# EAGLE board DME_Board_2 (EAGLE 7.2.0)
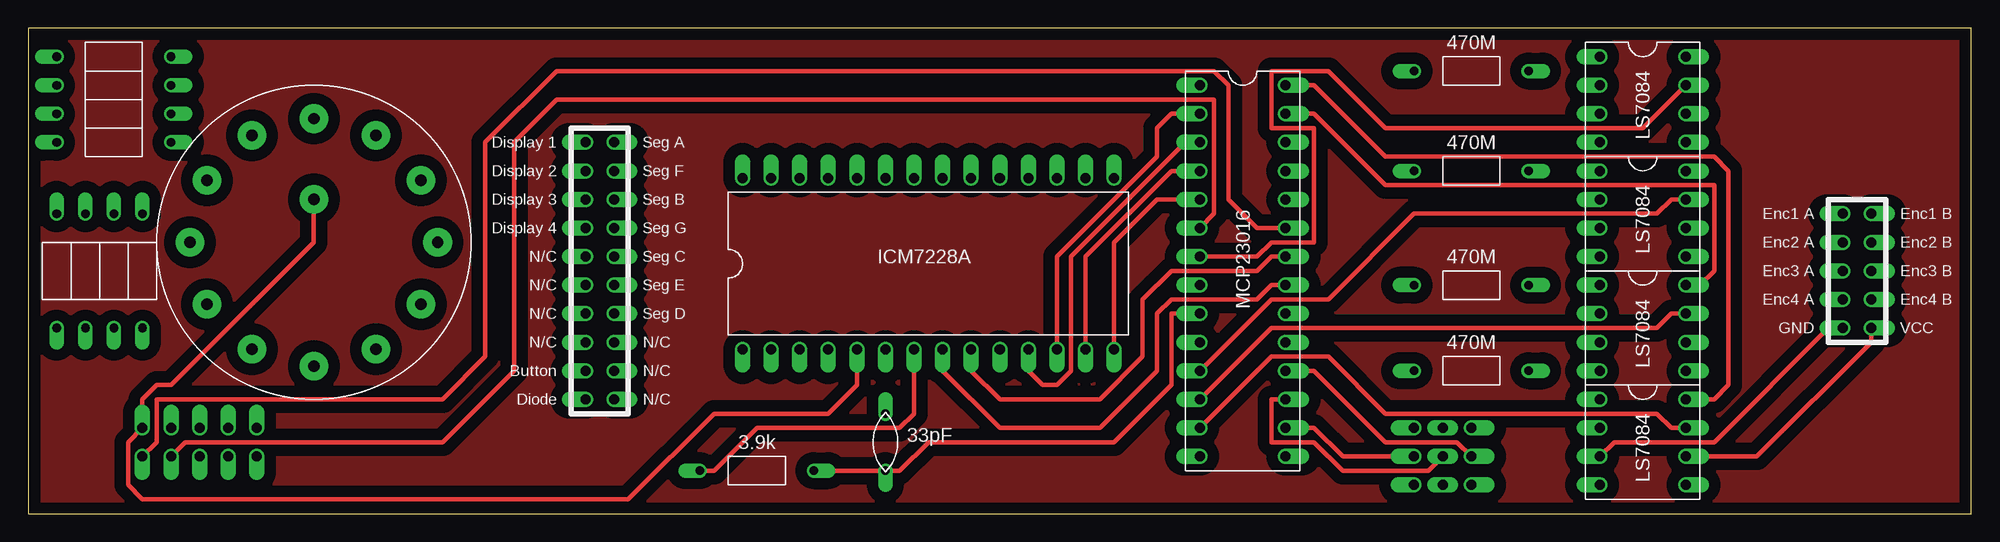
[diagram p0: board, top side]
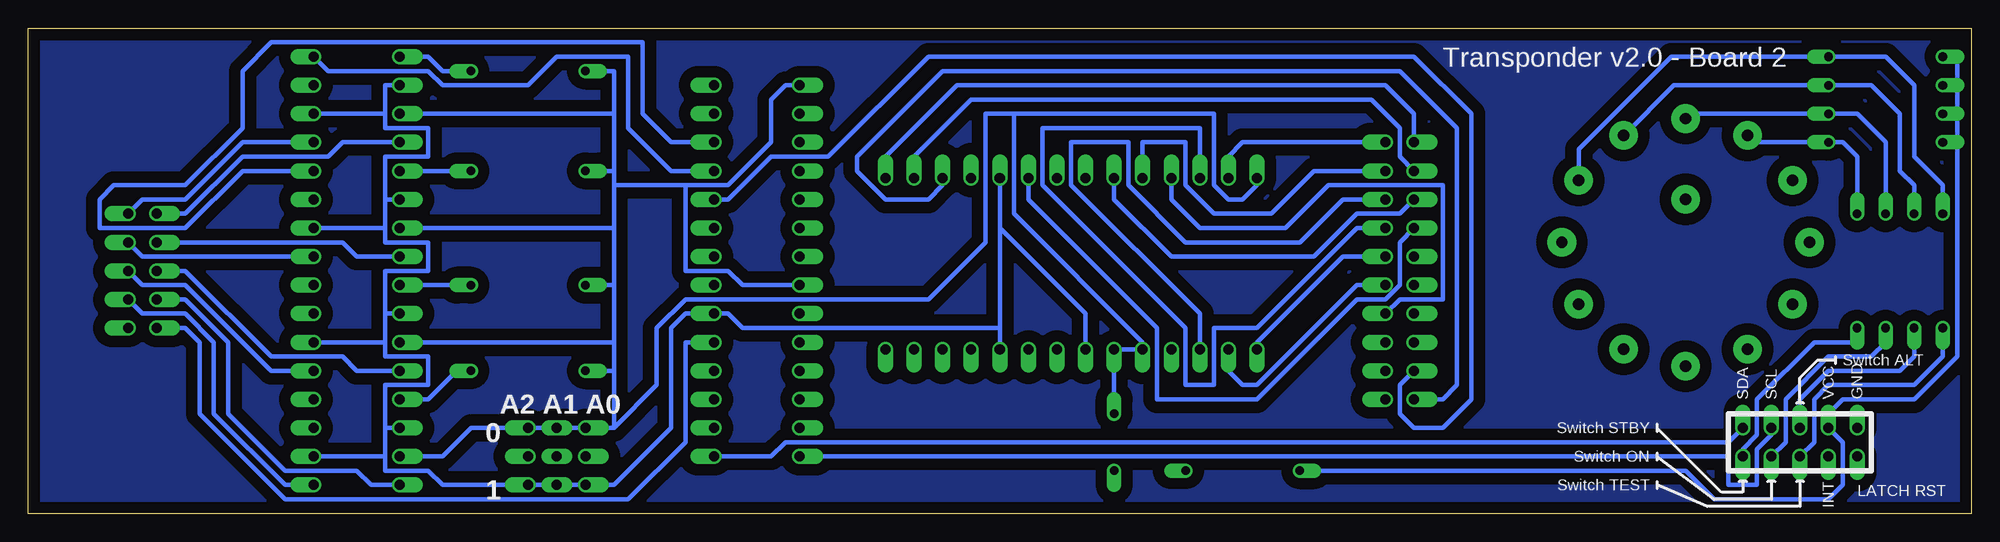
[diagram p1: board, bottom side, seen from below]

Size 172.72 x 43.18 mm. Coordinates in mm from the lower left corner, seen from the top.
Outline: 0,43.18 0,0 172.72,0 172.72,43.18 0,43.18
Copper layers (1*16): Top 0.035mm / dielectric 1.5mm / Bottom 0.035mm
Design rules "RadioStack_v2": minimum track width 0.2mm, minimum drill 0.4mm, track to track 0.2mm, track to pad 0.2mm, pad to pad 0.2mm, via to via 0.2mm, smd to smd 0.2mm, copper to edge 0.5mm, drill to drill 8mil, minimum pad ring 10mil, minimum via ring 8mil, stop-mask expansion 4mil, vias tented up to drill 0mil, thermal gap 10mil

## Footprints (pad centres in the part's own frame; a part is rotated, then mirrored left to right if it is on the bottom)
LS7084 = drill 0.889 pad 1.27 offset: P$1 0,0; P$2 0,-2.54; P$3 0,-5.08; P$4 0,-7.62; P$5 7.62,-7.62; P$6 7.62,-5.08; P$7 7.62,-2.54; P$8 7.62,0
LISTA_2X5 = drill 0.889 pad 1.27 offset: 1 0,0; 2 0,-2.54; 3 0,-5.08; 4 0,-7.62; 5 0,-10.16; 6 2.54,-10.16; 7 2.54,-7.62; 8 2.54,-5.08; 9 2.54,-2.54; 10 2.54,0
ICM7228A = drill 0.889 pad 1.27 offset: P$1 0,0; P$2 0,-2.54 | drill 0.889 offset: P$3 0,-5.08; P$4 0,-7.62; P$5 0,-10.16; P$6 0,-12.7; P$7 0,-15.24; P$8 0,-17.78; P$9 0,-20.32; P$10 0,-22.86; P$11 0,-25.4; P$12 0,-27.94; P$13 0,-30.48; P$14 0,-33.02; P$15 15.24,-33.02; P$16 15.24,-30.48; P$17 15.24,-27.94; P$18 15.24,-25.4; P$19 15.24,-22.86; P$20 15.24,-20.32; P$21 15.24,-17.78; P$22 15.24,-15.24; P$23 15.24,-12.7; P$24 15.24,-10.16; P$25 15.24,-7.62; P$26 15.24,-5.08; P$27 15.24,-2.54; P$28 15.24,0
LISTA_2X10 = drill 0.889 pad 1.27 offset: 1 0,0; 2 0,-2.54; 3 0,-5.08; 4 0,-7.62; 5 0,-10.16; 6 0,-12.7; 7 0,-15.24; 8 0,-17.78; 9 0,-20.32; 10 0,-22.86; 11 2.54,-22.86; 12 2.54,-20.32; 13 2.54,-17.78; 14 2.54,-15.24; 15 2.54,-12.7; 16 2.54,-10.16; 17 2.54,-7.62; 18 2.54,-5.08; 19 2.54,-2.54; 20 2.54,0
REZISTOR = drill 0.762 pad 1.27 offset: P$1 -5.08,0; P$2 5.08,0
MCP23016 = drill 0.889 pad 1.27 offset: A0 7.62,-30.48; A1 7.62,-27.94; A2 7.62,-25.4; CLK 0,-20.32; GP0.0 7.62,-17.78; GP0.1 7.62,-15.24; GP0.2 7.62,-12.7; GP0.3 7.62,-10.16; GP0.4 7.62,-7.62; GP0.5 7.62,-5.08; GP0.6 7.62,-2.54; GP0.7 7.62,0; GP1.0 0,-2.54; GP1.1 0,-5.08; GP1.2 0,-7.62; GP1.3 0,-10.16; GP1.4 0,-15.24; GP1.5 0,-25.4; GP1.6 0,-27.94; GP1.7 0,-30.48; SCL 0,-33.02; SDA 7.62,-33.02; TP 0,-22.86; VDD 7.62,-20.32; VSS1 0,0; VSS2 0,-17.78; VSS3 7.62,-22.86; ~INT 0,-12.7
ADRESA_0..2 = drill 0.889 pad 1.27 offset: P$1 0,0; P$2 0,-2.54; P$3 0,-5.08; P$7 5.08,0; P$8 5.08,-2.54; P$9 5.08,-5.08 | drill 0.889 pad 1.27 long: P$4 2.54,-5.08; P$5 2.54,-2.54; P$6 2.54,0
KONDENZATOR = drill 0.762 pad 1.27 offset: P$1 -2.54,0; P$2 2.54,0
ROTARY_SWITCH = drill 1.016 pad 2.54: 1 5.5,9.5; 2 9.5,5.5; 3 11,0; 4 9.5,-5.5; 5 5.5,-9.5; 6 0,-11; 7 -5.5,-9.5; 8 -9.5,-5.5; 9 -11,0; 10 -9.5,5.5; 11 -5.5,9.5; 12 0,11; A 0,3.81

## Placement (x,y rotation side)
U$1  LS7084  [LS7084]  139.7,40.64 0 top
U$2  LS7084  [LS7084]  139.7,30.48 0 top
U$3  LS7084  [LS7084]  139.7,20.32 0 top
U$4  LS7084  [LS7084]  139.7,10.16 0 top
U$5  LISTA_2X5  [LISTA_2X5]  10.16,7.62 270 bottom
U$6  ICM7228A  [ICM7228A]  63.5,14.61 90 top
U$7  LISTA_2X10  [LISTA_2X10]  49.53,33.02 0 top
U$8  470M  [REZISTOR]  128.27,39.37 0 top
U$9  MCP23016  [MCP23016]  104.14,38.1 0 top
U$10  470M  [REZISTOR]  128.27,30.48 0 top
U$11  ADRESA_0..2  [ADRESA_0..2]  128.27,2.54 180 top
U$12  470M  [REZISTOR]  128.27,20.32 0 top
U$13  470M  [REZISTOR]  128.27,12.7 0 top
U$14  3.9k  [REZISTOR]  64.77,3.81 0 top
U$15  33pF  [KONDENZATOR]  76.2,6.35 90 top
U$16  ROTARY_SWITCH  [ROTARY_SWITCH]  25.4,24.13 0 top
U$17  [REZISTOR]  7.62,33.02 0 top
U$18  [REZISTOR]  7.62,35.56 0 top
U$19  [REZISTOR]  7.62,38.1 0 top
U$20  [REZISTOR]  7.62,40.64 0 top
U$21  [REZISTOR]  10.16,21.59 90 top
U$22  [REZISTOR]  7.62,21.59 90 top
U$23  [REZISTOR]  5.08,21.59 90 top
U$24  [REZISTOR]  2.54,21.59 90 top
U$27  LISTA_2X5  [LISTA_2X5]  161.29,26.67 0 top

## Library data of the parts
U$1-U$24 U$27 = RadioStack_v2

## Nets
GND: U$1.P$3 U$2.P$3 U$3.P$3 U$4.P$3 U$5.1 U$6.P$5 U$6.P$6 U$6.P$28 U$8.P$1 U$9.VSS1 U$9.VSS2 U$9.VSS3 U$10.P$1 U$11.P$3 U$11.P$4 U$11.P$9 U$12.P$1 U$13.P$1 U$15.P$2 U$16.A U$27.5
N$1: U$6.P$27 U$7.20
N$2: U$6.P$24 U$7.19
N$3: U$6.P$3 U$7.18
N$4: U$6.P$26 U$7.17
N$5: U$6.P$1 U$7.16
N$6: U$6.P$2 U$7.15
N$7: U$6.P$25 U$7.14
N$8: U$6.P$15 U$7.1
N$9: U$6.P$16 U$7.2
N$10: U$6.P$23 U$7.3
N$11: U$6.P$20 U$7.4
N$12: U$1.P$2 U$1.P$6 U$2.P$2 U$2.P$6 U$3.P$2 U$3.P$6 U$4.P$2 U$4.P$6 U$5.2 U$6.P$7 U$6.P$10 U$6.P$19 U$9.VDD U$11.P$1 U$11.P$6 U$11.P$7 U$14.P$1 U$17.P$1 U$18.P$1 U$19.P$1 U$20.P$1 U$27.6
N$13: U$6.P$12 U$9.GP1.0
N$14: U$1.P$8 U$9.GP0.4
N$15: U$2.P$8 U$9.GP0.5
N$16: U$1.P$1 U$8.P$2
N$17: U$2.P$1 U$10.P$2
N$18: U$3.P$1 U$12.P$2
N$19: U$4.P$1 U$13.P$2
N$20: U$6.P$11 U$9.GP1.1
N$21: U$3.P$8 U$9.GP0.6
N$22: U$4.P$8 U$9.GP0.7
N$23: U$1.P$7 U$9.GP1.4
N$24: U$1.P$4 U$27.1
N$25: U$1.P$5 U$27.10
N$26: U$2.P$4 U$27.2
N$27: U$2.P$5 U$27.9
N$28: U$3.P$4 U$27.3
N$29: U$3.P$5 U$27.8
N$30: U$4.P$4 U$27.4
N$31: U$4.P$5 U$27.7
N$32: U$2.P$7 U$9.GP1.5
N$33: U$3.P$7 U$9.GP1.6
N$34: U$4.P$7 U$9.GP1.7
N$35: U$9.A0 U$11.P$8
N$36: U$9.A1 U$11.P$5
N$37: U$9.A2 U$11.P$2
N$38: U$6.P$13 U$9.GP1.2
N$39: U$6.P$14 U$9.GP1.3
N$40: U$16.11 U$17.P$2 U$21.P$2
N$41: U$6.P$8 U$9.GP0.0
N$42: U$6.P$9 U$9.GP0.1
N$43: U$16.12 U$18.P$2 U$22.P$2
N$44: U$5.4 U$9.SCL
N$45: U$5.5 U$9.SDA
N$46: U$5.9 U$9.~INT
N$47: U$5.10 U$9.GP0.2
N$48: U$9.CLK U$14.P$2 U$15.P$1
N$49: U$7.9 U$9.GP0.3
N$50: U$6.P$17 U$7.10
N$51: U$16.1 U$19.P$2 U$23.P$2
N$52: U$16.2 U$20.P$2 U$24.P$2
N$53: U$5.8 U$24.P$1
N$54: U$5.3 U$23.P$1
N$55: U$5.7 U$22.P$1
N$56: U$5.6 U$21.P$1

## Tracks (layer width: path | path; a pad name or v marks a point on that pad's centre or on a via)
GND
  Top 0.406: U$27.5 160.02,16.51 149.86,6.35 140.97,6.35 U$4.P$3 | U$6.P$5 73.66,11.43 71.12,8.89 60.96,8.89 53.34,1.27 10.16,1.27 8.89,2.54 8.89,6.35 U$5.1 10.16,10.16 11.43,11.43 12.7,11.43 25.4,24.13 U$16.A
  Bottom 0.406: U$6.P$28 63.5,29.21 64.77,27.94 66.04,27.94 67.31,29.21 67.31,35.56 85.09,35.56 | 85.09,35.56 85.09,26.67 73.66,15.24 U$6.P$5 U$6.P$6 U$15.P$2 | 120.65,7.62 U$11.P$9 U$11.P$4 U$11.P$3 133.35,7.62 135.89,5.08 U$4.P$3 | 120.65,7.62 116.84,11.43 116.84,16.51 114.3,19.05 92.71,19.05 87.63,24.13 87.63,35.56 85.09,35.56 | U$8.P$1 120.65,39.37 120.65,35.56 | 120.65,35.56 U$1.P$3 | 120.65,35.56 120.65,30.48 | 120.65,30.48 U$10.P$1 | U$2.P$3 120.65,25.4 | 120.65,25.4 120.65,29.21 | 120.65,29.21 120.65,30.48 | 120.65,25.4 120.65,20.32 | 120.65,20.32 U$12.P$1 | 120.65,12.7 120.65,15.24 | 120.65,15.24 120.65,20.32 | U$3.P$3 120.65,15.24 | U$13.P$1 120.65,12.7 | 120.65,12.7 120.65,7.62 | U$9.VSS1 105.41,38.1 106.68,36.83 106.68,33.02 110.49,29.21 114.3,29.21 | 114.3,29.21 120.65,29.21 | U$9.VSS2 109.22,20.32 110.49,21.59 114.3,21.59 114.3,29.21 | U$9.VSS3 114.3,15.24 114.3,6.35 119.38,1.27 149.86,1.27 157.48,8.89 157.48,15.24 158.75,16.51 U$27.5
N$1
  Bottom 0.406: U$7.20 64.77,33.02 66.04,31.75 U$6.P$27
N$2
  Bottom 0.406: U$7.19 58.42,30.48 62.23,26.67 67.31,26.67 69.85,29.21 69.85,33.02 73.66,33.02 U$6.P$24
N$3
  Bottom 0.406: U$7.18 55.88,27.94 59.69,24.13 69.85,24.13 74.93,29.21 74.93,33.02 80.01,33.02 80.01,29.21 68.58,17.78 U$6.P$3
N$4
  Bottom 0.406: U$6.P$26 68.58,34.29 82.55,34.29 82.55,29.21 69.85,16.51 69.85,11.43 67.31,11.43 67.31,16.51 63.5,16.51 54.61,25.4 U$7.17
N$5
  Bottom 0.406: U$7.16 55.88,22.86 63.5,15.24 U$6.P$1
N$6
  Bottom 0.406: U$7.15 54.61,20.32 63.5,11.43 64.77,11.43 66.04,12.7 U$6.P$2
N$7
  Bottom 0.406: U$6.P$25 71.12,27.94 68.58,25.4 60.96,25.4 57.15,29.21 46.99,29.21 46.99,19.05 50.8,19.05 U$7.14
N$8
  Bottom 0.406: U$7.1 49.53,35.56 52.07,38.1 90.17,38.1 96.52,31.75 U$6.P$15
N$9
  Bottom 0.406: U$6.P$16 93.98,31.75 88.9,36.83 53.34,36.83 50.8,34.29 50.8,31.75 U$7.2
N$10
  Bottom 0.406: U$7.3 50.8,26.67 54.61,26.67 58.42,22.86 71.12,22.86 76.2,27.94 U$6.P$23
N$11
  Bottom 0.406: U$6.P$20 83.82,27.94 72.39,16.51 72.39,10.16 63.5,10.16 54.61,19.05 52.07,19.05 50.8,20.32 50.8,24.13 U$7.4
N$12
  Top 0.406: U$27.6 163.83,15.24 153.67,5.08 U$4.P$6 | U$6.P$7 78.74,8.89 77.47,7.62 64.77,7.62 60.96,3.81 U$14.P$1
  Bottom 0.406: U$1.P$2 140.97,38.1 140.97,35.56 | U$3.P$2 140.97,17.78 | U$4.P$2 140.97,7.62 | 140.97,5.08 U$4.P$6 | U$2.P$2 140.97,27.94 | 140.97,27.94 140.97,31.75 137.16,31.75 137.16,34.29 140.97,34.29 140.97,35.56 | 140.97,17.78 140.97,21.59 137.16,21.59 137.16,24.13 140.97,24.13 140.97,25.4 | 140.97,25.4 140.97,27.94 | 140.97,7.62 140.97,11.43 137.16,11.43 137.16,13.97 140.97,13.97 140.97,15.24 | 140.97,15.24 140.97,17.78 | U$3.P$6 140.97,15.24 | U$2.P$6 140.97,25.4 | U$1.P$6 140.97,35.56 | 140.97,5.08 140.97,3.81 137.16,3.81 135.89,2.54 U$11.P$1 U$11.P$6 U$11.P$7 120.65,2.54 115.57,7.62 115.57,16.51 114.3,17.78 U$9.VDD 110.49,17.78 109.22,16.51 86.36,16.51 | 140.97,5.08 140.97,7.62 | U$6.P$19 86.36,25.4 | 86.36,25.4 86.36,16.51 | 86.36,16.51 U$6.P$10 | U$6.P$7 78.74,17.78 86.36,25.4 | 1.27,33.02 1.27,13.97 5.08,10.16 11.43,10.16 12.7,8.89 U$5.2 11.43,6.35 11.43,2.54 12.7,1.27 22.86,1.27 25.4,3.81 U$14.P$1 | U$17.P$1 1.27,33.02 | 1.27,33.02 1.27,35.56 | U$18.P$1 1.27,35.56 | 1.27,35.56 1.27,38.1 | U$19.P$1 1.27,38.1 | 1.27,38.1 1.27,40.64 U$20.P$1
N$13
  Top 0.406: U$6.P$12 91.44,22.86 100.33,31.75 100.33,34.29 101.6,35.56 U$9.GP1.0
N$14
  Bottom 0.406: U$1.P$8 146.05,39.37 137.16,39.37 135.89,38.1 128.27,38.1 125.73,40.64 119.38,40.64 119.38,34.29 115.57,30.48 U$9.GP0.4
N$15
  Bottom 0.406: U$2.P$8 153.67,30.48 158.75,25.4 166.37,25.4 166.37,27.94 165.1,29.21 158.75,29.21 153.67,34.29 153.67,39.37 151.13,41.91 118.11,41.91 118.11,35.56 115.57,33.02 U$9.GP0.5
N$16
  Bottom 0.406: U$8.P$2 135.89,39.37 137.16,40.64 U$1.P$1
N$17
  Bottom 0.406: U$10.P$2 U$2.P$1
N$18
  Bottom 0.406: U$12.P$2 U$3.P$1
N$19
  Bottom 0.406: U$13.P$2 134.62,12.7 137.16,10.16 U$4.P$1
N$20
  Top 0.406: U$6.P$11 88.9,12.7 90.17,11.43 91.44,11.43 92.71,12.7 92.71,22.86 102.87,33.02 U$9.GP1.1
N$21
  Top 0.406: U$3.P$8 148.59,20.32 149.86,21.59 149.86,29.21 120.65,29.21 114.3,35.56 U$9.GP0.6
N$22
  Top 0.406: U$4.P$8 149.86,10.16 151.13,11.43 151.13,30.48 149.86,31.75 120.65,31.75 114.3,38.1 U$9.GP0.7
N$23
  Top 0.406: U$1.P$7 143.51,34.29 120.65,34.29 115.57,39.37 110.49,39.37 110.49,34.29 114.3,34.29 114.3,24.13 110.49,24.13 109.22,22.86 U$9.GP1.4
N$24
  Bottom 0.406: U$1.P$4 144.78,33.02 146.05,31.75 153.67,31.75 158.75,26.67 U$27.1
N$25
  Bottom 0.406: U$1.P$5 153.67,33.02 158.75,27.94 162.56,27.94 U$27.10
N$26
  Bottom 0.406: U$2.P$4 143.51,22.86 144.78,24.13 U$27.2
N$27
  Bottom 0.406: U$2.P$5 162.56,22.86 U$27.9
N$28
  Bottom 0.406: U$3.P$4 143.51,12.7 144.78,13.97 151.13,13.97 158.75,21.59 U$27.3
N$29
  Bottom 0.406: U$3.P$5 151.13,12.7 158.75,20.32 162.56,20.32 U$27.8
N$30
  Bottom 0.406: U$4.P$4 142.24,2.54 143.51,3.81 149.86,3.81 154.94,8.89 154.94,15.24 158.75,19.05 U$27.4
N$31
  Bottom 0.406: U$4.P$5 149.86,2.54 156.21,8.89 156.21,15.24 158.75,17.78 162.56,17.78 U$27.7
N$32
  Top 0.406: U$2.P$7 146.05,27.94 144.78,26.67 123.19,26.67 115.57,19.05 110.49,19.05 U$9.GP1.5
N$33
  Top 0.406: U$3.P$7 146.05,17.78 144.78,16.51 110.49,16.51 U$9.GP1.6
N$34
  Top 0.406: U$4.P$7 146.05,7.62 144.78,8.89 120.65,8.89 115.57,13.97 110.49,13.97 U$9.GP1.7
N$35
  Top 0.406: U$11.P$8 116.84,5.08 114.3,7.62 U$9.A0
N$36
  Top 0.406: U$11.P$5 124.46,3.81 116.84,3.81 114.3,6.35 110.49,6.35 110.49,10.16 U$9.A1
N$37
  Top 0.406: U$11.P$2 127,6.35 120.65,6.35 114.3,12.7 U$9.A2
N$38
  Top 0.406: U$6.P$13 93.98,22.86 101.6,30.48 U$9.GP1.2
N$39
  Top 0.406: U$6.P$14 96.52,24.13 100.33,27.94 U$9.GP1.3
N$40
  Bottom 0.406: U$16.11 19.29,33.02 U$17.P$2 11.43,33.02 10.16,31.75 U$21.P$2
N$41
  Top 0.406: U$6.P$8 81.28,12.7 86.36,7.62 95.25,7.62 100.33,12.7 100.33,17.78 101.6,19.05 109.22,19.05 110.49,20.32 U$9.GP0.0
N$42
  Top 0.406: U$6.P$9 83.82,12.7 86.36,10.16 95.25,10.16 99.06,13.97 99.06,19.05 101.6,21.59 109.22,21.59 110.49,22.86 U$9.GP0.1
N$43
  Bottom 0.406: U$16.12 24.97,35.56 U$18.P$2 10.16,35.56 7.62,33.02 U$22.P$2
N$44
  Bottom 0.406: U$9.SCL 21.59,5.08 21.59,2.54 19.05,2.54 19.05,5.71 17.78,6.98 U$5.4
N$45
  Bottom 0.406: U$9.SDA 106.68,5.08 105.41,6.35 21.59,6.35 U$5.5
N$46
  Top 0.406: U$9.~INT 105.41,26.67 105.41,36.83 46.99,36.83 43.18,33.02 43.18,12.7 36.83,6.35 13.97,6.35 U$5.9
N$47
  Top 0.406: U$9.GP0.2 109.22,25.4 106.68,27.94 106.68,38.1 105.41,39.37 46.99,39.37 40.64,33.02 40.64,13.97 36.83,10.16 11.43,10.16 11.43,6.35 U$5.10
N$48
  Top 0.406: U$9.CLK 101.6,17.78 101.6,11.43 96.52,6.35 80.01,6.35 77.47,3.81 U$15.P$1 U$14.P$2
N$49
  Bottom 0.406: U$9.GP0.3 110.49,27.94 106.68,31.75 101.6,31.75 92.71,40.64 49.53,40.64 44.45,35.56 44.45,10.16 46.99,7.62 49.53,7.62 50.8,8.89 50.8,11.43 U$7.9
N$50
  Bottom 0.406: U$6.P$17 91.44,29.21 92.71,27.94 96.52,27.94 99.06,30.48 99.06,31.75 91.44,39.37 50.8,39.37 45.72,34.29 45.72,11.43 46.99,10.16 U$7.10
N$51
  Bottom 0.406: U$16.1 26.43,38.1 U$19.P$2 8.89,38.1 6.35,35.56 6.35,30.48 5.08,29.21 U$23.P$2
N$52
  Bottom 0.406: U$16.2 34.9,32.41 26.67,40.64 U$20.P$2 7.62,40.64 5.08,38.1 5.08,31.75 2.54,29.21 U$24.P$2
N$53
  Bottom 0.406: U$5.8 13.97,6.35 13.97,10.16 12.7,11.43 5.08,11.43 2.54,13.97 U$24.P$1
N$54
  Bottom 0.406: U$23.P$1 5.08,13.97 6.35,12.7 12.7,12.7 15.24,10.16 U$5.3
N$55
  Bottom 0.406: U$22.P$1 7.62,15.24 8.89,13.97 12.7,13.97 16.51,10.16 16.51,6.35 U$5.7
N$56
  Bottom 0.406: U$21.P$1 10.16,15.24 13.97,15.24 19.05,10.16 19.05,6.98 20.32,5.71 U$5.6
N$57
  pour Bottom (isolate 1.016): 0.64,42.55 172.09,42.55 172.09,0.63 0.64,0.63
N$58
  pour Top (isolate 1.016): 0.64,42.55 172.09,42.55 172.09,0.63 0.64,0.63

## Text on the board
tPlace: Display 1 | Seg A | Display 2 | Seg F | Display 3 | Seg B | Enc1 A | Enc1 B | Display 4 | Seg G | Enc2 A | Enc2 B | N/C | Seg C | Enc3 A | Enc3 B | N/C | Seg E | Enc4 A | Enc4 B | N/C | Seg D | GND | VCC | N/C | N/C | Button | N/C | Diode | N/C
bPlace: Transponder v2.0 - Board 2 | Switch ALT | GND | VCC | SCL | SDA | A0 | A1 | A2 | Switch STBY | 0 | Switch ON | INT | LATCH RST | Switch TEST | 1